# Altium PCB PCB_Node.PcbDoc
Units mil, origin at the board's own origin, x right, y up, seen from the top; angles counter-clockwise.
Board outline 3830 x 2065 mil, 2 copper layers (Top Layer, Bottom Layer); 39 components, 33 nets, 112 pads, 0 vias.
Unrouted connection lines stored in the file: 2.
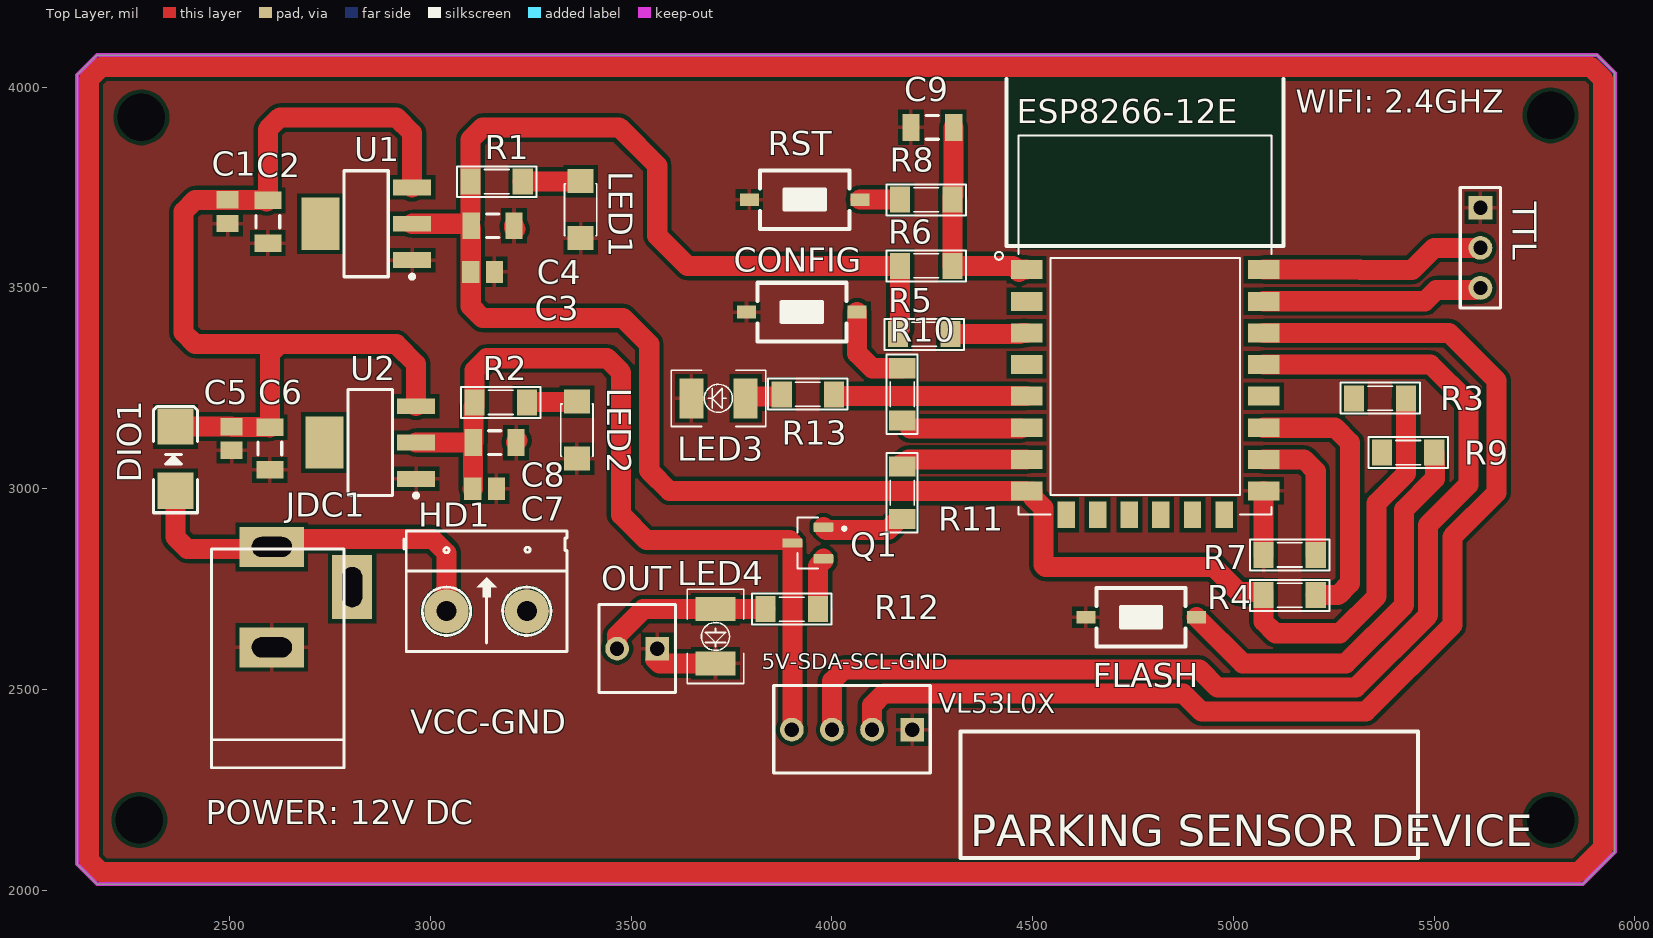
[diagram p0: Top Layer view]
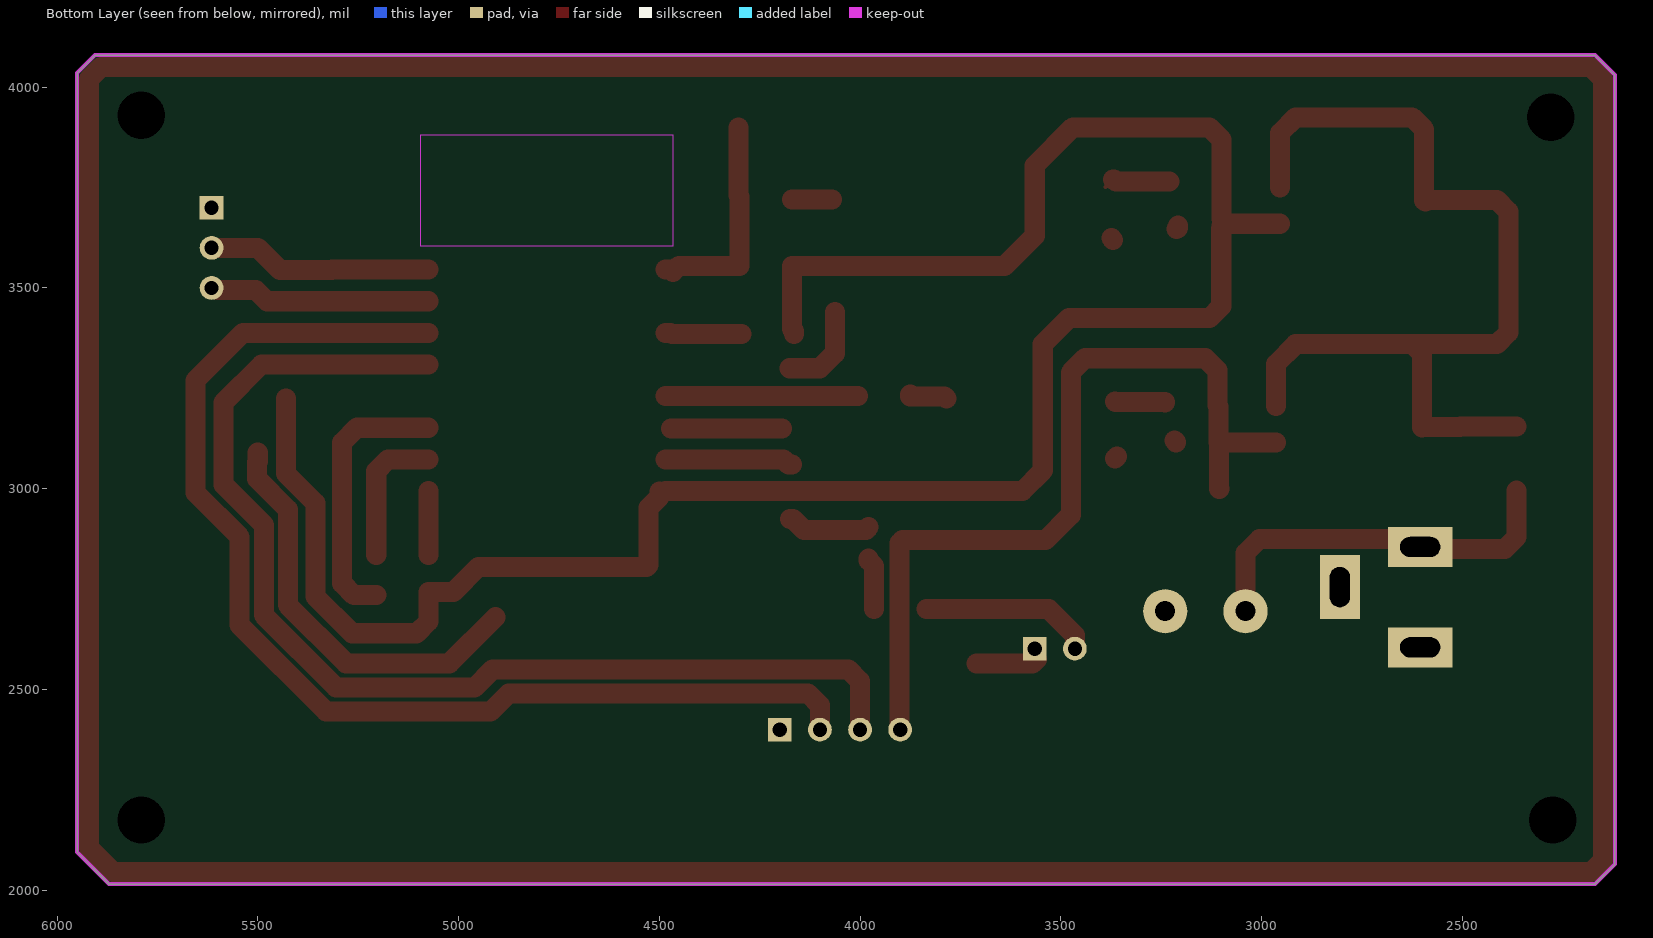
[diagram p1: Bottom Layer view, seen from below]
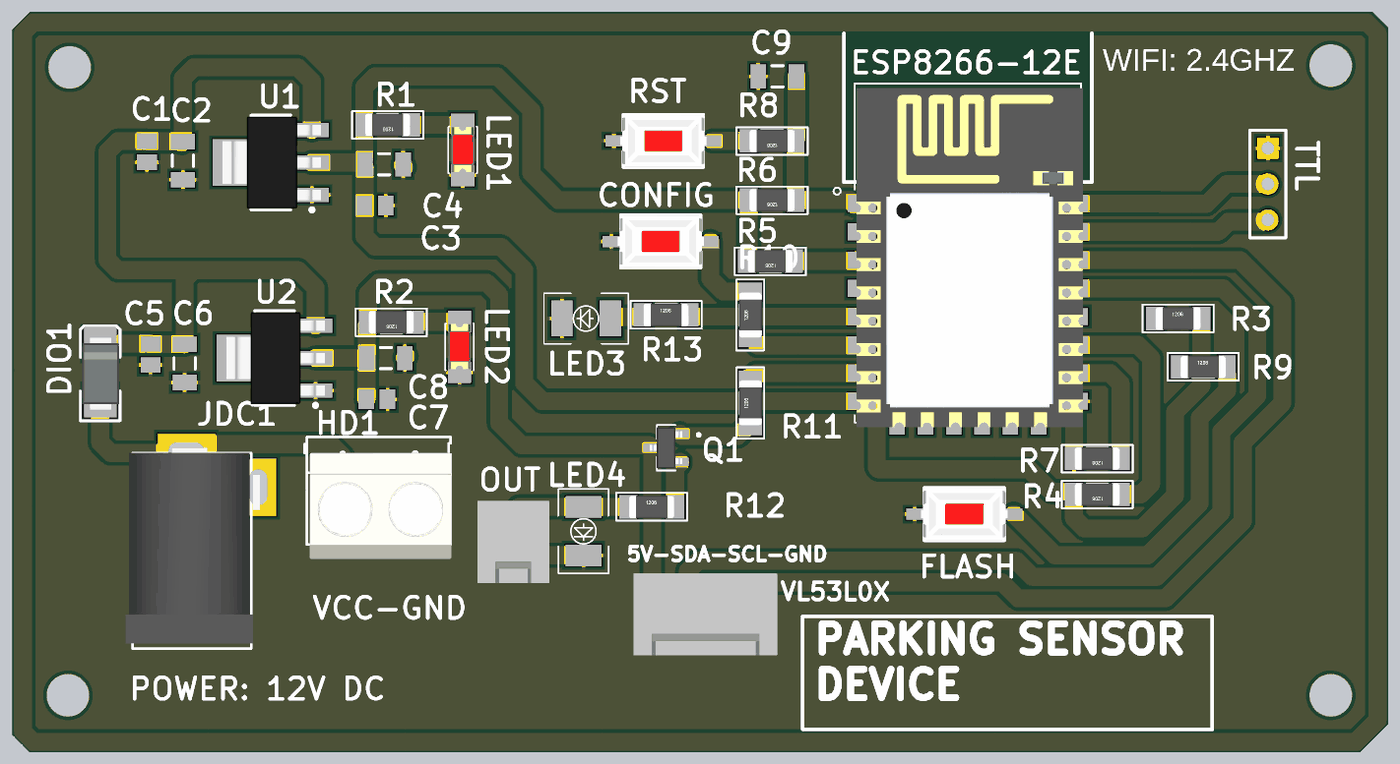
[diagram p2: 3D render of the assembled board from above, using the file's embedded part models]

## Layer stack, top to bottom
Top Solder: solder mask 0.4, Solder Resist, Dk 3.5
Top Layer: signal copper 1.4
Dielectric 1: dielectric 12.6, FR-4, Dk 4.8
Bottom Layer: signal copper 1.4
Bottom Solder: solder mask 0.4, Solder Resist, Dk 3.5

## Board outline
2120,2065 2170,2015 5870,2015 5950,2095 5950,4035 5905,4080 2170,4080 2165,4075 2120,4030

## Design rules (kind name [scope] priority, off if disabled: settings)
Clearance [All] p1: gap=10 ignorepadtopadclearanceinfootprint=FALSE except(0: Arc-Hole Track-Hole SMDPad-Hole THPad-Hole Via-Hole Fill-Hole Poly-Hole Region-Hole Text-Hole)
PolygonConnect [All] p1: connectstyle=Relief reliefconductorwidth=10 reliefentries=4 polygonreliefangle="90 Angle" airgapwidth=10
RoomDefinition Schematic_Node [InComponentClass('Schematic_Node')] p1: confinementstyle=ConfineIn formatcopy=TRUE lockcomponents=FALSE outline 0,0 2000,0 2000,1000 0,1000
RoutingVias [All] p1: holewidth=28 width=50 viastyle="Through Hole" minholewidth=28 minwidth=50 maxholewidth=28 maxwidth=50
SolderMaskExpansion [All] p1: expansion=4 istentingtop=FALSE
Width [All] p1: maxlimit=50 minlimit=39.37 preferedwidth=50 toplayer_minwidth=50 bottomlayer_maxwidth=39.37 bottomlayer_prefwidth=39.37 minimp=50.000000 maximp=50.000000 favimp=50.000000
30 further rules are at their usual default settings.

## Components (designator, comment, footprint, x,y, rotation, side; value= is the part's Value field where it differs from the comment)
C1 "Cap Pol3" C0805 2495,3690 r270 top value=10uF
C2 "" C1206 2595,3665 r90 top value=0.1uF
C3 "Cap Pol3" C0805 3130,3540 r0 top value=10uF
C4 "Cap Semi" C1206 3155,3655 r180 top value=0.1uF
C5 "Cap Pol3" C0805 2505,3125 r270 top value=10uF
C6 "" C1206 2600,3100 r90 top value=0.1uF
C7 "Cap Pol3" C0805 3135,3000 r0 top value=10uF
C8 "Cap Semi" C1206 3160,3115 r180 top value=0.1uF
C9 "Cap Semi" C1206 4250,3900 r0 top value=103
CONFIG "SW-SMD" SW-SMD 3925,3440 r0 top
DIO1 "Diode SMD" DIO-SMD-106 2365,3075 r270 top value=1N5007
ESP8266-12E "ESP8266-12E/ESP-12E" XCVR_ESP8266-12E/ESP-12E 4780,3270 r0 top
FLASH "SW-SMD" SW-SMD 4770,2680 r0 top
HD1 "Header 2" HED2 3040,2695 r0 top
JDC1 "Jack DC" DC-IN 2705,2730 r90 top value="Jac DC"
LED1 "LED" LED-1206-Red 3374,3766 r270 top value="LED 3 - 5 ly 2 Colour"
LED2 "LED" LED-1206-Red 3365,3217 r270 top value="LED 3 - 5 ly 2 Colour"
LED3 "LED-Green" LED-GREEN-0805 3785,3225 r180 top value=Green
LED4 "LED-Red" LED-RED-0805 3710,2700 r270 top value=Red
OUT "Header2" HDR2 3565,2601.75 r180 top
Q1 "BC847B" SOT100P230X110-3N 3940,2865 r270 top
R1 "470" RES-SMD-1206 3165,3765 r180 top
R2 "470" RES-SMD-1206 3175,3215 r180 top
R3 "10K" RES-SMD-1206 5365,3225 r0 top
R4 "10K" RES-SMD-1206 5140,2735 r180 top
R5 "10K" RES-SMD-1206 4230,3385 r180 top
R6 "10K" RES-SMD-1206 4235,3555 r180 top
R7 "10K" RES-SMD-1206 5140,2835 r180 top
R8 "470" RES-SMD-1206 4235,3720 r180 top
R9 "470" RES-SMD-1206 5435,3090 r0 top
R10 "470" RES-SMD-1206 4175,3235 r90 top
R11 "470" RES-SMD-1206 4175,2990 r90 top
R12 "470" RES-SMD-1206 3900,2700 r0 top
R13 "470" RES-SMD-1206 3940,3235 r0 top
RST "SW-SMD" SW-SMD 3932.2,3720 r0 top
TTL "TTL" HDR1X3 5615,3700 r270 top
U1 "LM1117-3.3V" SOT223 2840,3660 r90 top
U2 "LM1117-5V" SOT223 2850,3115 r90 top
VL53L0X "VL53L0X" HDR4 4200,2400 r180 top

## Footprints (in the part's own frame and the unit in brackets; to place one, negate y for a bottom-side part, rotate by r counter-clockwise, add the part's x,y. Pads: shape width x height; smd on the part's side, far side on the other; paste and mask are expansions set on the pad)
C0805 [mm] "Chip Capacitor, Body 2.0x1.3mm, IPC High Density"
  rect 1.1x1.4 smd: 1(-0.75,0) 2(0.75,0)
  body extent -1.1,-0.72 1.1,0.72, height 1.4
C1206 [mm] "Chip Capacitor, Body 3.2x1.6mm, IPC High Density"
  rect 1.1x1.7 smd: 1(-1.35,0) 2(1.35,0)
  silkscreen extent -0.4,-0.75 0.4,0.75, body extent -1.7,-0.9 1.7,0.9, height 1.3
DC-IN [mil]
  rect 100x160 hole 50 slot 100 at 90 deg: 1(125,100) 2(-125,100)
  rect 160x100 hole 50 slot 100 at 0 deg: 3(25,-100)
  silkscreen extent -425,-80 120,250, body extent -410,-105 134,269, height 434
DIO-SMD-106 [mil]
  rect 90x90.55 smd: 1(80,0) 2(-80,0)
  silkscreen extent -130,-55 135,55, body extent -99,-50 106,52, height 95
HDR1X3 [mm] "Connector; Header; 3 Position"
  rect 1.5x1.5 hole 0.9: 1(0,0)
  round 1.5 hole 0.9: 2(2.54,0) 3(5.08,0)
  silkscreen extent -1.27,-1.27 6.35,1.27
HDR2 [mm] "Connector; Header; 2 Position"
  rect 1.5x1.5 hole 0.9: 1(0,0)
  round 1.5 hole 0.9: 2(2.54,0)
  silkscreen extent -1.14,-2.79 3.68,2.77, body extent -1.27,-2.92 3.81,2.88, height 11.72
HDR4 [mm] "Connector; Header; 4 Position"
  rect 1.5x1.5 hole 0.9: 1(0,0)
  round 1.5 hole 0.9: 2(2.54,0) 3(5.08,0) 4(7.62,0)
  silkscreen extent -1.14,-2.79 8.76,2.74, body extent -1.27,-2.92 8.89,2.88, height 11.72
HED2 [mil] "Header 2, 2 pin, hight 300mil, Pin to Pin 200, Colour Green"
  round 110 hole 50: 1(0,0) 2(200,0)
  silkscreen extent -106,-100 300,200, body extent -92,-140 302,155, height 394
LED-1206-Red [mil]
  rect 60x65 smd: 1(0,0) 2(142,0)
  silkscreen extent 6,-40 136,40, body extent 7,-31 133,32, height 43
LED-GREEN-0805 [mil]
  rect 60x100 smd: 1(0,0) 2(135,0)
  silkscreen extent -50,-70 185,70, body extent -20,-60 154,60, height 75
LED-RED-0805 [mil]
  rect 60x100 smd: 1(0,0) 2(135,0)
  silkscreen extent -50,-70 185,70, body extent -20,-60 154,60, height 75
RES-SMD-1206 [mil]
  rect 50x65 smd: 1(-65,0) 2(65,0)
  silkscreen extent -99,-38 99,39, body extent -63,-31 63,32, height 40
SOT100P230X110-3N [mm]
  rrect25% 0.59x1.26 smd: 1(-1,0.98) 2(1,0.98) 3(0,-0.98)
  silkscreen extent -1.61,-0.65 1.61,2.4, body extent -1.45,-1.15 1.45,1.15, height 1.1
SOT223 [mm]
  rect 1x2.4 smd: 1(-2.3,-2.9) 2(0,-2.9) 3(2.3,-2.9)
  rect 3.3x2.4 smd: 4(0,2.9)
  silkscreen extent -3.47,-3.03 3.35,1.4, body extent -3.25,-3.56 3.25,3.4, height 1.68
SW-SMD [mm]
  rect 1.2x0.8 smd: 1(-3.5,0) 2(3.5,0)
  silkscreen extent -2.82,-1.85 2.82,1.85, body extent -3.05,-1.85 3.05,1.85, height 2.5
XCVR_ESP8266-12E/ESP-12E [mm]
  rect 2x1.2 smd: 1(-7.5,7) 2(-7.5,5) 3(-7.5,3) 4(-7.5,1) 5(-7.5,-1) 6(-7.5,-3) 7(-7.5,-5) 8(-7.5,-7) 15(7.5,-7) 16(7.5,-5) 17(7.5,-3) 18(7.5,-1) 19(7.5,1) 20(7.5,3) 21(7.5,5) 22(7.5,7)
  rect 1.1x1.7 smd: 9(-5,-8.5) 10(-3,-8.5) 11(-1,-8.5) 12(1,-8.5) 13(3,-8.5) 14(5,-8.5)
  Keep-Out Layer region: 8,8.51 -8.009,8.51 -8.009,15.5 8,15.5
  Keep-Out Layer region: 8,8.51 -8.009,8.51 -8.009,15.5 8,15.5
  silkscreen extent -9.5,-8.5 8,15.5, body extent -7.87,-8.83 8.13,15.18, height 3

## Part data
C1 C3 C5 C7: "Polarized Capacitor (Surface Mount)", LatestRevisionDate=29-May-2009, LatestRevisionNote="IPC-7351 Footprint Added.", PackageDescription="Chip Capacitor", PackageReference=C0805, Published=8-Jun-2000, Publisher="Altium Limited"
C2 C6: library part "Cap Semi", "Capacitor (Semiconductor SIM Model)", LatestRevisionDate=29-May-2009, LatestRevisionNote="IPC-7351 Footprint Added.", PackageDescription="Chip Capacitor", PackageReference=C1206, Published=8-Jun-2000, Publisher="Altium Limited"
C4 C8 C9: "Capacitor (Semiconductor SIM Model)", LatestRevisionDate=29-May-2009, LatestRevisionNote="IPC-7351 Footprint Added.", PackageDescription="Chip Capacitor", PackageReference=C1206, Published=8-Jun-2000, Publisher="Altium Limited"
CONFIG FLASH RST: "Switch", LatestRevisionDate=17-Jul-2002, LatestRevisionNote="Re-released for DXP Platform.", PackageReference=SPST-2, Published=24-Mar-1999, Publisher="Altium Limited"
DIO1: "Default Diode", Code - JEDEC=DO-214-AB, Published=8-Jun-2000, Publisher="Altium Limited", Revision="July-2002: Re-released for DXP Platform."
ESP8266-12E: "This WiFi module has a 32-bit MCU micro and clock speeds supporting 80 MHz or 160 MHz. Supports the RTOS and integrated Wi-Fi MAC/BB/RF/PA/LNA, and has an on-board antenna.", Package=None, Availability=Unavailable, MF=AI-Thinker, MP=ESP8266-12E/ESP-12E, Price=None, SnapEDA_Link=https://www.snapeda.com/parts/ESP8266-12E/ESP-12E/AI-Thinker/view-part/106414/?ref=snap
HD1: library part Hed2, "Header 2 (Green)"
JDC1: "Jack DC input"
LED1 LED2: library part "LED SMD"
LED3: "LED Green 2mA 3V 0805", ComponentLink1Description=Datasheet, ComponentLink1URL="D:\Dropbox\Datasheets\Opto and Illumination\LEDs\SMD LED.pdf", Unit Price=0.0476
LED4: library part Led-Red, "LED Red 2mA 1.8V 0805", ComponentLink1Description=Datasheet, ComponentLink1URL="D:\Dropbox\Datasheets\Opto and Illumination\LEDs\SMD LED.pdf", Unit Price=0.0476
OUT: "Header IDC, 2 x 1 Pin Vertical 2.54mm Pitch (Non-Boxed, Male)", Manufacturer="W¨¹rth Elektronik eiSos GmbH", partNo=613002143121, ComponentLink1 Description=Manufacturer, ComponentLink1URL=http://www.we-online.com, ComponentLink2 Description=Datasheet, ComponentLink2URL=http://katalog.we-online.de/em/datasheet/6130xx143121.pdf, Created by="Karrer Zheng", Created Date="29 March 2013", NoPins=02
Q1: "Bipolar (BJT) Transistor NPN 45V 100mA 100MHz 150mW Surface Mount SOT-523", Package="SOT-23-3 NXP Semiconductors", Availability=Unavailable, MF=STMicroelectronics, MP=BC847B, Price=None, SnapEDA_Link=https://www.snapeda.com/parts/BC847B/STMicroelectronics/view-part/945669/?ref=snap
R1 R2 R3 R4 R5 R6 R7 R8 R9 R10 R11 R12 R13: library part Res-SMD, "Resistor", Manufacturer="Generic Components", Class=Passive, Published=08/06/2000, Publisher="Altium Hobart Technology Centre"
TTL: library part "Header 3", "Header, 3-Pin", LatestRevisionDate=17-Jul-2002, LatestRevisionNote="Re-released for DXP Platform.", Publisher="Altium Limited"
U1 U2: library part LM1117, "800mA Low-Dropout Linear Regulator", Creator="Nguyen Ba Bien", Website=http://group3i.net
VL53L0X: library part Header4, "Header IDC, 4 x 1 Pin Vertical 2.54mm Pitch (Non-Boxed, Male)", Manufacturer="W¨¹rth Elektronik eiSos GmbH", partNo=613002143121, ComponentLink1 Description=Manufacturer, ComponentLink1URL=http://www.we-online.com, ComponentLink2 Description=Datasheet, ComponentLink2URL=http://katalog.we-online.de/em/datasheet/6130xx143121.pdf, Created by="Karrer Zheng", Created Date="29 March 2013", NoPins=02

## Free pads (board coordinates)
  round 60 hole 118.11: 1(5790,2175) 1(5790,2175) 2(5790,3930) 3(2275,2175) 4(2280,3925)

## Nets (pads, with @x,y where several pads share a name; then routed paths per layer and width w, separated by ;. In a path a pad name is that pad's centre, name@x,y a point inside that pad or via, vN(x,y) a via of type N, cw(c..) or ccw(c..) an arc to the next point about the centre after c; other vN are vias at no path point)
+3.3v: C3.1 C4.2 ESP8266-12E.8 R1.2 R3.2 R4.2 R5.2 R6.2 U1.2 | length 5523.6
  Top Layer w45: U1.2 U1.2@2956.99,3657.19 ; C4.2@3101.03,3655.82 C4.2
  Top Layer w50: U1.2 C4.2@3088.5,3660 ; R5.2 4165,3392.5 4170,3397.5 R6.2 3640,3555 3565,3630 3565,3805 3470,3900 3130,3900 3100,3870 R1.2 3100,3671.5 C4.2@3088.5,3660 ; ESP8266-12E.8 3595.59,2994.41 3545,3045 3545,3360 3480,3425 3129.76,3425 3100.47,3454.29 C3.1 3100.47,3648.03 C4.2@3088.5,3660 ; ESP8266-12E.8@4499.09,2993.03 4499.09,2980.04 4526.5,2952.64 4526.5,2810 4531.5,2805 4950.71,2805 5013.21,2742.5 5075,2742.5 R4.2 5075,2669.29 5104.29,2640 5265,2640 5356.53,2731.53 5356.53,2964.53 5430,3038 R3.2
+5: C7.1 C8.2 Q1.3 R2.2 U2.2 VL53L0X.4 | length 2111.5
  Top Layer w45: U2.2 U2.2@2966.99,3112.19
  Top Layer w50: U2.2 C8.2 ; C7.1 3106.16,3000.69 3106.16,3114.31 C8.2 ; VL53L0X.4 3901.42,2401.42 Q1.3 3894.6,2871.82 3538.18,2871.82 3475,2935 3475,3290 3440,3325 3140,3325 3110,3295 R2.2 3110,3207.5 3106.85,3204.35 C8.2
CS: ESP8266-12E.9
EN: ESP8266-12E.3 R5.1 | length 191
  Top Layer w50: R5.1 4468.62,3385 4471.73,3388.11 ESP8266-12E.3
GND: C1.2 C2.1 C3.2 C4.1 C5.2 C6.1 C7.2 C8.1 C9.1 CONFIG.1 ESP8266-12E.15 FLASH.1 HD1.2 JDC1.2 LED1.2 LED2.2 LED3.2 LED4.2 OUT.1 R7.2 RST.1 TTL.1 U1.1 U2.1 VL53L0X.1 | length 353.9
  Top Layer w10: LED1.2 LED1.2@3382,3616
  Top Layer w50: C4.1 3208.15,3649.88 C4.1@3211.5,3646.54 ; C8.1 3213.15,3116.65 C8.1@3216.5,3120 ; LED2.2@3360,3080 LED2.2 ; LED1.2@3370,3620 LED1.2 ; OUT.1@3560,2575 3570,2565 LED4.2 ; R7.2 5075,2842.5 5075.28,2842.77 ESP8266-12E.15
GPIO0: ESP8266-12E.18 R3.1 R9.1
GPIO2: ESP8266-12E.17 R4.1 | length 677.8
  Top Layer w50: ESP8266-12E.17 5253.11,3151.89 5290,3115 5290,2764.29 5260.71,2735 R4.1
GPIO4: ESP8266-12E.19 VL53L0X.3 | length 2831.2
  Top Layer w50: VL53L0X.3 4000,2520.71 4029.29,2550 4915,2550 4960,2505 5304.85,2505 5485,2685.15 5485,2910 5585,3010 5585,3215 5490.63,3309.37 ESP8266-12E.19
GPIO5: ESP8266-12E.20 VL53L0X.2 | length 2909.6
  Top Layer w50: VL53L0X.2 4100,2460.71 4129.29,2490 4875,2490 4920,2445 5329.71,2445 5545,2660.29 5545,2880 5655,2990 5655,3270 5536.89,3388.11 ESP8266-12E.20
GPIO9: ESP8266-12E.11
GPIO10: ESP8266-12E.12
GPIO12: ESP8266-12E.6 R10.1 | length 276.3
  Top Layer w50: R10.1@4194.29,3150 4469.84,3150 ESP8266-12E.6@4470.35,3150.51
GPIO13: ESP8266-12E.7 R11.2 | length 320.2
  Top Layer w50: R11.2@4170,3060 4177.5,3060 4190.65,3073.15 ESP8266-12E.7
GPIO14: ESP8266-12E.5 R13.2 | length 479.7
  Top Layer w50: R13.2@4005,3230.63 ESP8266-12E.5
GPIO15: ESP8266-12E.16 R7.1 | length 350.7
  Top Layer w50: ESP8266-12E.16 5175.71,3073.15 5205,3043.86 R7.1
GPIO16: ESP8266-12E.4
MOSI: ESP8266-12E.13
NetC1_1: C1.1 C2.2 C5.1 C6.2 DIO1.2 U1.3 U2.3 | length 2395.8
  Top Layer w10: C2.2@2591.85,3715 C2.2
  Top Layer w50: DIO1.2 2365.24,3154.76 2504.76,3154.76 C5.1 2505.69,3153.84 2599.31,3153.84 C6.2 2600,3335.71 2624.29,3360 ; C2.2@2591.85,3715 2588.01,3718.84 2495.69,3718.84 C1.1 2414.29,3719.53 2385,3690.24 2385,3389.29 2414.29,3360 2624.29,3360 ; C2.2 2595,3895 2625,3925 2915,3925 2954.17,3885.83 U1.3 ; U2.3 2964.17,3310.83 2915,3360 2624.29,3360
NetCONFIG_2: CONFIG.2 R10.2 | length 230.4
  Top Layer w50: CONFIG.2 4062.8,3337.2 4100,3300 R10.2
NetFLASH_2: FLASH.2 R9.2 | length 1037.3
  Top Layer w50: FLASH.2 5022.8,2565 5280,2565 5425,2710 5425,2948.15 5501.64,3024.79 5501.64,3066.21 5500,3067.86 R9.2
NetLED1_1: LED1.1 R1.1 | length 163.3
  Top Layer w10: LED1.1 LED1.1@3389,3751
  Top Layer w50: R1.1 3362.5,3765 3367.5,3770 LED1.1@3370,3770
NetLED2_1: LED2.1 R2.1 | length 126.4
  Top Layer w50: R2.1 3240,3216 3364,3216 LED2.1
NetLED3_1: LED3.1 R13.1 | length 97.1
  Top Layer w50: LED3.1 3790,3230 3875,3230 R13.1
NetLED4_1: LED4.1 OUT.2 R12.1 | length 430.2
  Top Layer w50: OUT.2 3465,2635 3530,2700 LED4.1 R12.1
NetQ1_1: Q1.1 R11.1 | length 210.6
  Top Layer w50: Q1.1 3985.45,2897.5 4140,2897.5 4167.5,2925 R11.1
NetQ1_2: Q1.2 R12.2 | length 131.3
  Top Layer w50: R12.2 3965,2807.5 3978.58,2821.09 Q1.2
NetR8_2: R8.2 RST.2 | length 100
  Top Layer w50: RST.2 R8.2
RST: C9.2 ESP8266-12E.1 R6.1 R8.1 | length 539.6
  Top Layer w50: C9.2 4303.15,3730.64 4300,3727.5 R8.1 R6.1 4451.14,3555 4466.14,3540 4471.73,3545.59 ESP8266-12E.1
"RX TTL": ESP8266-12E.22 TTL.2 | length 562.8
  Top Layer w50: ESP8266-12E.22 5315,3545.59 5315.59,3545 5445,3545 5500,3600 TTL.2
SCL: ESP8266-12E.14
"TX TTL": ESP8266-12E.21 TTL.3 | length 536.4
  Top Layer w50: ESP8266-12E.21 5476.85,3466.85 5505,3495 TTL.3@5600,3495
VCC: DIO1.1 HD1.1 JDC1.1 | length 990.6
  Top Layer w50: DIO1.1 2365,2879.29 2394.29,2850 JDC1.1@2625,2850 ; JDC1.1 2625,2875 3005,2875 3040,2840 HD1.1
MISO: ESP8266-12E.10
pads on no net: ESP8266-12E.2 JDC1.3 U1.4 U2.4
copper on no net: | length 11453.4
  Top Layer w50: 2150,3075 2150,2074.29 2179.29,2045 5860,2045 5920,2105 5920,4020.71 5890.71,4050 2179.29,4050 2150,4020.71 2150,3085

## Polygon pours and split planes (outlines as drawn)
GND on Top Layer "NONET_L-01_P-001" (solid, pour order 0): 2179.29,4050 2160,4030.71 2160,2040 5855,2040 5920,2105 5920,4015 5895,4040

## Keep-outs
Keep-Out Layer:
  lines w10: 1745,60 1780,95 ; 12615,5210 12715,5110 ; 2120,2065 2170,2015 5870,2015 5950,2095 5950,4025 5950,4035 5905,4080 2170,4080 2165,4075 2120,4030 2120,2065

## Other copper
Top Layer:
  pour cut-out: 4430,4025 4435,4020 4435,3600 5130,3600 5125,3605 5125,4025

## Silkscreen, mask and mechanical layers (free items; w line width, h text height)
Top Overlay:
  lines w10: 4435,4020 4435,3605 5125,3605 5125,4020 ; 4320,2080.88 4320,2395 5460,2395 5460,2080 4320.88,2080 4320,2080.88
  text "WIFI: 2.4GHZ" at 5155,3916.06 h98.43
  text "5V-SDA-SCL-GND" at 3825,2550 h39.37
  text "VCC-GND" at 2950,2390 h60
  text "POWER: 12V DC" at 2440,2165 h60
  text "PARKING SENSOR DEVICE" at 4345,2110 h78.74